# EAGLE board ml-rf-2 (EAGLE 5.00)
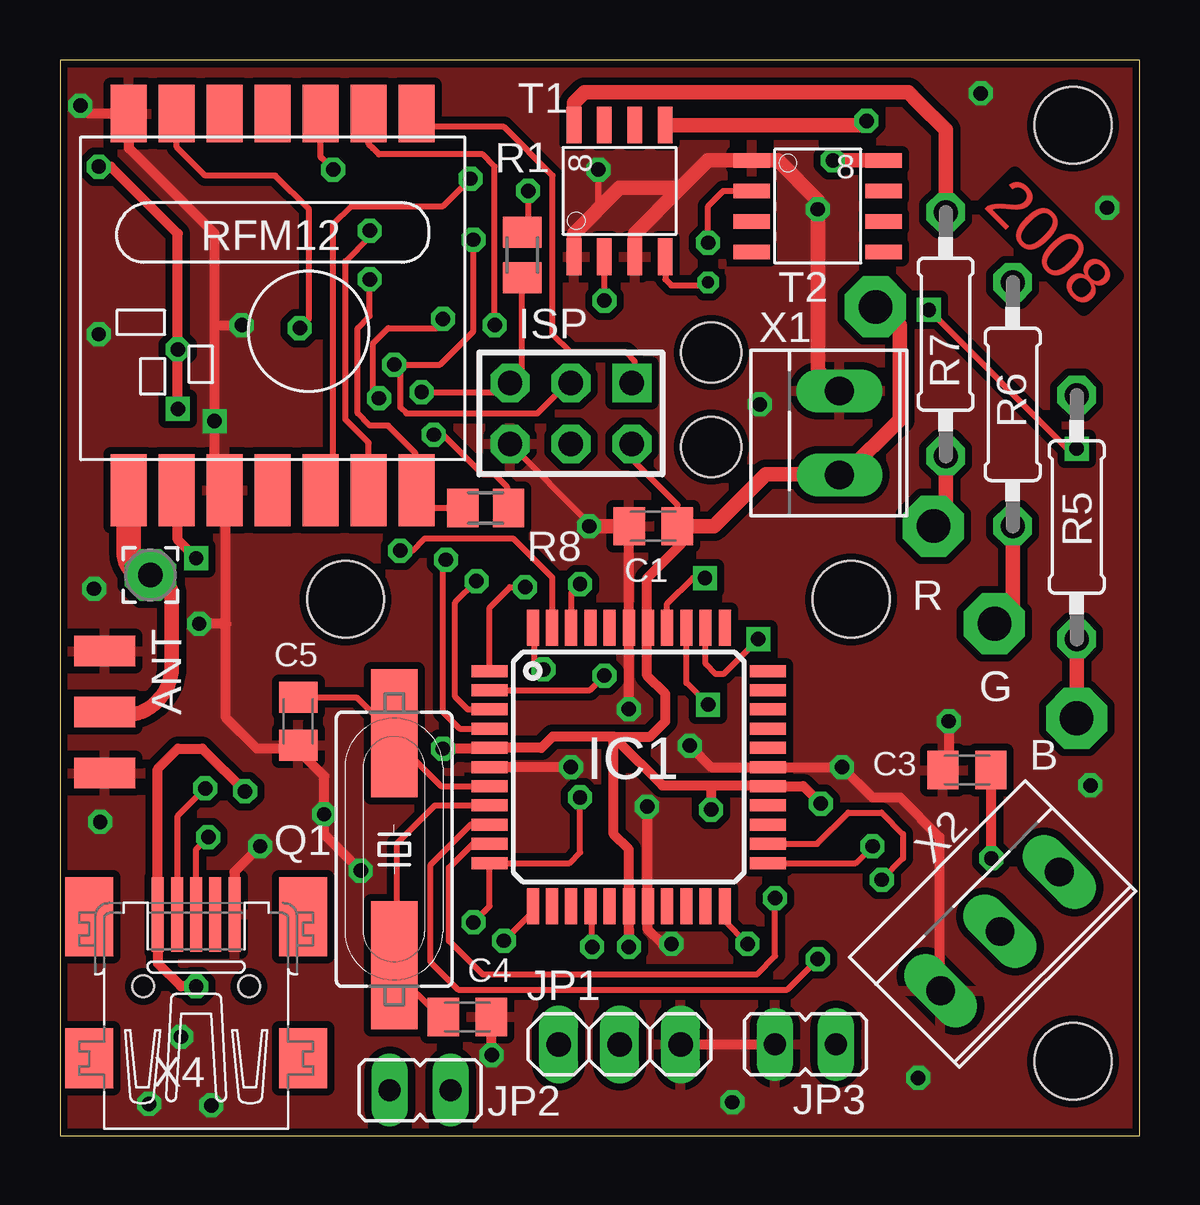
[diagram p0: board, top side]
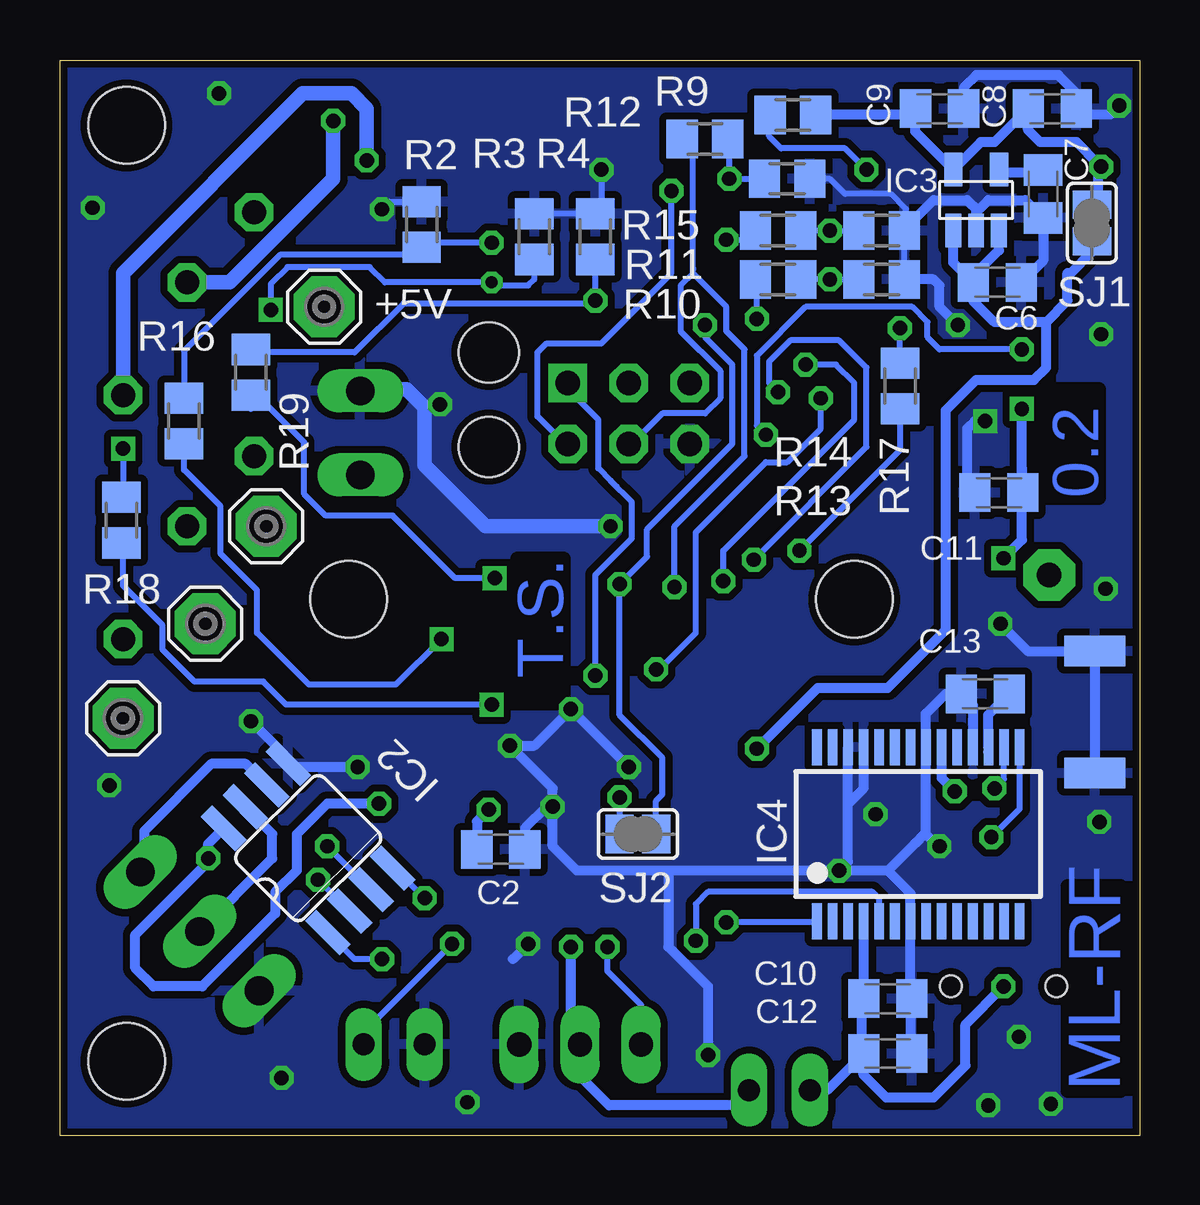
[diagram p1: board, bottom side, seen from below]

Size 45.01 x 44.82 mm. Coordinates in mm from the lower left corner, seen from the top.
Outline: 0,0 45.01,0 45.01,44.82 0,44.82 0,0
Copper layers (1*16): Top 0.035mm / dielectric 1.5mm / Bottom 0.035mm
Design rules "zwlinning *": minimum track width 0.2mm, minimum drill 0.5mm, track to track 0.2mm, track to pad 0.2mm, pad to pad 0.2mm, via to via 0.2mm, smd to smd 0mil, copper to edge 0.3mm, drill to drill 0.3mm, minimum pad ring 0.3mm, minimum via ring 0.2mm, stop-mask expansion 0.1mm, vias tented up to drill 0mil, thermal gap 0.3mm
Holes 3.2 mm at 11.9,22.35 32.98,22.35 42.23,42.1 42.23,3.1
Holes 2.5 mm at 27.14,32.63 27.14,28.7

## Footprints (pad centres in the part's own frame; a part is rotated, then mirrored left to right if it is on the bottom)
SE14 = drill 1.397 pad 2.54 octagon: MP 0,0
2,15/1,0 = drill 1.016 pad 2.159 octagon: 1 0,0
C0805K = smd 1.3 x 1.6: 1 -1,0; 2 1,0
TQFP44 = smd 1.5 x 0.5: 1 -5.8,4; 2 -5.8,3.2; 3 -5.8,2.4; 4 -5.8,1.6; 5 -5.8,0.8; 6 -5.8,0; 7 -5.8,-0.8; 8 -5.8,-1.6; 9 -5.8,-2.4; 10 -5.8,-3.2; 11 -5.8,-4; 23 5.8,-4; 24 5.8,-3.2; 25 5.8,-2.4; 26 5.8,-1.6; 27 5.8,-0.8; 28 5.8,0; 29 5.8,0.8; 30 5.8,1.6; 31 5.8,2.4; 32 5.8,3.2; 33 5.8,4 | smd 0.5 x 1.5: 12 -4,-5.8; 13 -3.2,-5.8; 14 -2.4,-5.8; 15 -1.6,-5.8; 16 -0.8,-5.8; 17 0,-5.8; 18 0.8,-5.8; 19 1.6,-5.8; 20 2.4,-5.8; 21 3.2,-5.8; 22 4,-5.8; 34 4,5.8; 35 3.2,5.8; 36 2.4,5.8; 37 1.6,5.8; 38 0.8,5.8; 39 0,5.8; 40 -0.8,5.8; 41 -1.6,5.8; 42 -2.4,5.8; 43 -3.2,5.8; 44 -4,5.8
SO08 = smd 0.66 x 2.032: 1 -1.905,-3.073; 2 -0.635,-3.073; 3 0.635,-3.073; 4 1.905,-3.073; 5 1.905,3.073; 6 0.635,3.073; 7 -0.635,3.073; 8 -1.905,3.073
SOT-23-5 = smd 0.662 x 1.397: 1 -0.953,-1.27; 2 0,-1.27; 3 0.953,-1.27 | smd 0.762 x 1.397: 4 0.953,1.27; 5 -0.953,1.27
SSOP28 = smd 0.4 x 1.5: 1 -4.225,-3.625; 2 -3.575,-3.625; 3 -2.925,-3.625; 4 -2.275,-3.625; 5 -1.625,-3.625; 6 -0.975,-3.625; 7 -0.325,-3.625; 8 0.325,-3.625; 9 0.975,-3.625; 10 1.625,-3.625; 11 2.275,-3.625; 12 2.925,-3.625; 13 3.575,-3.625; 14 4.225,-3.625; 15 4.225,3.625; 16 3.575,3.625; 17 2.925,3.625; 18 2.275,3.625; 19 1.625,3.625; 20 0.975,3.625; 21 0.325,3.625; 22 -0.325,3.625; 23 -0.975,3.625; 24 -1.625,3.625; 25 -2.275,3.625; 26 -2.925,3.625; 27 -3.575,3.625; 28 -4.225,3.625
AVR-ISP-6 = drill 1.016 square: 1 -2.54,-1.27 | drill 1.016 octagon: 2 -2.54,1.27; 3 0,-1.27; 4 0,1.27; 5 2.54,-1.27; 6 2.54,1.27
1X03 = drill 1.016 long: 1 -2.54,0; 2 0,0; 3 2.54,0
JP1 = drill 0.914 long: 1 0,-1.27; 2 0,1.27
SMD1,27-2,54 = smd 1.27 x 2.54: 1 0,0
HC49UP@1 = smd 5.334 x 1.93: 1 -4.826,0; 2 4.826,0
M0805 = smd 1.3 x 1.6: 1 -0.95,0; 2 0.95,0
0207/10 = drill 1 octagon: 1 -5.08,0; 2 5.08,0
RFM12 = smd 1.5 x 2.4: 1 -5,-9.7; 2 -3,-9.7; 3 -1,-9.7; 4 1,-9.7; 5 3,-9.7; 6 5,-9.7; 7 7,-9.7 | smd 1.5 x 3: 8 7,6; 9 5,6; 10 3,6; 11 1,6; 12 -1,6; 13 -3,6; 14 -5,6
SJ = smd 1.168 x 1.6: 1 -0.762,0; 2 0.762,0
SO-8 = smd 1.524 x 0.61: 1 -2.743,1.27; 2 -2.743,0; 3 -2.743,-1.27; 4 -2.743,-2.54; 5 2.743,-2.54; 6 2.743,-1.27; 7 2.743,0; 8 2.743,1.27
W237-102-3.5-1.2 = drill 1.2 long: 1 -1.7,0 | drill 1.194 long: 2 1.8,0
W237-103-3.5-1.2 = drill 1.2 long: 1 -3.5,0 | drill 1.194 long: 2 0,0; 3 3.5,0
32005-201 = smd 3.1 x 0.5: 1 3,1.6; 2 3,0.8; 3 3,0; 4 3,-0.8; 5 3,-1.6 | smd 2.5 x 2: M1 -3,-4.45; M2 -3,4.45 | smd 3.3 x 2: M3 2.9,4.45; M4 2.9,-4.45 | hole 0.9: 0,2.2; 0,-2.2

## Placement (x,y rotation side)
+5V  SE14  [SE14]  34,34.54 0 bottom
ANT  [2,15/1,0]  3.77,23.36 0 top
B  SE14  [SE14]  42.38,17.39 0 bottom
C1  100nF  [C0805K]  24.73,25.39 180 top
C2  100nF  [C0805K]  26.63,11.93 0 bottom
C3  100nF  [C0805K]  37.81,15.24 180 top
C4  22pF  [C0805K]  16.98,4.95 180 top
C5  22pF  [C0805K]  9.93,17.27 90 top
C6  10µF  [C0805K]  5.93,35.55 0 bottom
C7  10nF  [C0805K]  4.03,39.24 270 bottom
C8  10µF  [C0805K]  3.65,42.79 0 bottom
C9  100nF  [C0805K]  8.34,42.79 0 bottom
C10  100nF  [C0805K]  10.5,5.71 0 bottom
C11  100nF  [C0805K]  5.87,26.79 0 bottom
C12  100nF  [C0805K]  10.5,3.42 0 bottom
C13  100nF  [C0805K]  6.44,18.41 0 bottom
G  SE14  [SE14]  38.95,21.33 0 bottom
IC1  MEGA16-A  [TQFP44]  23.71,15.36 0 top
IC2  MAX481CSA  [SO08]  34.66,11.99 45 bottom
IC3  [SOT-23-5]  6.82,38.98 0 bottom
IC4  FT232RL  [SSOP28]  9.23,12.57 0 bottom
ISP  AVR-ISP-6  [AVR-ISP-6]  21.3,30.09 180 top
JP1  [1X03]  23.33,3.8 0 top
JP2  [JP1]  15.01,1.9 270 top
JP3  [JP1]  31.08,3.8 90 top
PAD1  [SMD1,27-2,54]  1.87,17.65 90 top
PAD2  [SMD1,27-2,54]  1.87,20.19 90 top
PAD3  [SMD1,27-2,54]  1.87,15.11 90 top
PAD4  [SMD1,27-2,54]  1.87,15.11 270 bottom
PAD5  [SMD1,27-2,54]  1.87,20.19 90 bottom
Q1  16Mhz  [HC49UP@1]  13.93,11.93 90 top
R  SE14  [SE14]  36.41,25.39 0 bottom
R1  10K  [M0805]  19.27,36.7 90 top
R2  100K  [M0805]  29.93,37.97 90 bottom
R3  100K  [M0805]  25.23,37.46 90 bottom
R4  100K  [M0805]  22.7,37.46 90 bottom
R5  5R  [0207/10]  42.38,25.78 270 top
R6  5R  [0207/10]  39.71,30.47 270 top
R7  8R  [0207/10]  36.92,33.4 270 top
R8  100K  [M0805]  17.74,26.16 0 top
R9  10K  [M0805]  14.46,42.52 0 bottom
R10  [M0805]  15.07,35.68 0 bottom
R11  [M0805]  15.07,37.71 0 bottom
R12  [M0805]  18.12,41.52 0 bottom
R13  [M0805]  10.76,35.68 0 bottom
R14  [M0805]  10.76,37.71 0 bottom
R15  [M0805]  14.69,39.87 0 bottom
R16  10R  [M0805]  39.84,29.78 270 bottom
R17  10K  [M0805]  9.99,31.24 90 bottom
R18  10R  [M0805]  42.44,25.65 270 bottom
R19  10R  [M0805]  37.05,31.81 270 bottom
RFM12  FRM12  [RFM12]  9.87,32.89 180 top
SJ1  [SJ]  1.99,38.03 90 bottom
SJ2  [SJ]  20.92,12.57 0 bottom
T1  IRF7103  [SO-8]  22.7,39.37 90 top
T2  IRF7103  [SO-8]  31.59,39.37 0 top
X1  [W237-102-3.5-1.2]  32.49,29.33 270 top
X2  [W237-103-3.5-1.2]  39.18,8.51 225 top
X4  MINI-USB-SCHIELD-32005-201  [32005-201]  5.68,6.22 90 top

## Library data of the parts
+5V B G R = solpad
ANT PAD1-PAD5 = wirepad
C1-C13 R1-R4 R8-R19 = rcl
IC1 ISP = atmel
IC2 = maxim
IC3 = regulators
IC4 = ftdichip
JP1 = pinhead
JP2 JP3 SJ1 SJ2 = jumper
Q1 = crystal
R5-R7 = rclml
RFM12 = RFM12
T1 T2 = transistor-fet+irf7201
X1 X2 = clamps
X4 = con-cypressindustries

## Nets
!IRQ: IC1.42 RFM12.2 SJ2.2
!RE: IC1.24 IC2.2
!RST: IC1.4 ISP.5 R1.1
!SS: IC1.44 R10.1
+3V3: C8.1 C9.1 C11.2 IC3.5 R8.2 R9.2 RFM12.9 SJ1.2
+5V: +5V.MP C1.1 C2.1 C3.1 C6.1 IC1.5 IC1.17 IC1.27 IC1.38 IC2.8 IC3.1 IC3.3 ISP.2 JP1.2 JP2.2 R1.2 SJ1.1 X1.2
A: IC2.6 X2.1
B: IC2.7 X2.2
BY: C7.1 IC3.4
DE: IC1.23 IC2.3
GND: C1.2 C2.2 C3.2 C4.1 C5.1 C6.2 C7.2 C8.2 C9.2 C10.2 C11.1 C12.2 C13.1 IC1.6 IC1.18 IC1.28 IC1.39 IC2.5 IC3.2 IC4.7 IC4.18 IC4.21 IC4.25 IC4.26 ISP.6 JP1.3 JP3.2 PAD2.1 PAD3.1 PAD4.1 PAD5.1 R2.2 R3.2 R4.2 R13.2 R14.2 R15.2 RFM12.7 RFM12.10 T1.1 T1.3 T2.1 X1.1 X2.3 X4.5
IR: IC1.15 JP1.1
MISO: IC1.2 ISP.1 RFM12.1
MOSI: IC1.1 ISP.4 R12.1
N$1: R7.1 T1.8
N$3: R11.2 R14.1 RFM12.13
N$4: R6.1 T1.5
N$5: R5.1 T2.8
N$6: R12.2 R15.1 RFM12.12
N$7: R7.2 R.MP
N$8: G.MP R6.2
N$9: B.MP R5.2
N$10: IC4.16 X4.2
N$11: R9.1 RFM12.3
N$12: R17.2 RFM12.6
N$13: ANT.1 PAD1.1 RFM12.8
N$14: R8.1 R10.2 R13.1 RFM12.14
N$16: IC4.15 X4.3
N$17: IC1.22 JP3.1
N$18: IC1.37 R19.2
N$19: IC1.36 R18.2
N$20: C13.2 IC4.17
N$21: IC1.35 R16.2
PB: R2.1 R16.1 T2.2
PG: R3.1 R18.1 T1.4
PR: R4.1 R19.1 T1.2
RF12RST: IC1.43 R17.1
RXD: IC1.9 IC2.1
SCK: IC1.3 ISP.3 R11.1
TXD: IC1.10 IC2.4
USBRX: IC1.12 IC4.5
USBTX: IC1.11 IC4.1 SJ2.1
VBUS: C10.1 C12.1 IC4.4 IC4.20 JP2.1 X4.1
XTAL1: C5.2 IC1.7 Q1.2
XTAL2: C4.2 IC1.8 Q1.1

## Tracks (layer width: path | path; a pad name or v marks a point on that pad's centre or on a via)
!IRQ  (via drill 0.6)
  Top 0.254: 13.04,41.14 13.3,40.89 17.61,40.89 18.12,40.38 v18.12,33.78 | 13.04,41.14 12.92,41.27 | RFM12.2 12.87,41.32 13.04,41.14 | IC1.42 21.31,22.61 v21.68,22.98
  Bottom 0.254: v18.12,33.78 18.12,33.27 16.98,32.13 16.98,28.82 20.54,25.27 20.54,24.12 v21.68,22.98 21.68,17.52 19.9,15.74 19.9,14.22 20.16,13.96 SJ2.2
!RE  (via drill 0.6)
  Top 0.254: IC1.24 31.56,12.16 32.86,13.46 34.25,13.46 35.14,12.57 35.14,11.55 v34.25,10.66
  Bottom 0.254: IC2.2 32.97,9.39 33.11,9.39 33.11,9.52 v34.25,10.66
!RST  (via drill 0.6)
  Top 0.254: 18.5,31.11 ISP.5 18.88,31.36 | v15.07,30.98 18.5,30.98 18.88,31.36 | 19.14,35.81 19.2,35.81 R1.1 | 19.14,35.55 19.27,35.68 R1.1 | IC1.4 16.65,16.96 15.96,17.65 15.96,24 v16.09,24 | R1.1 19.27,35.81 | 18.88,31.36 19.27,31.74 R1.1
  Bottom 0.254: v15.07,30.98 15.46,31.36 15.46,32.25 14.57,33.14 12.54,33.14 11.39,32 11.39,28.7 v16.09,24
!SS  (via drill 0.6)
  Top 0.254: 19.77,21.08 19.71,21.14 IC1.44 19.77,21.1 19.77,21.08 | v15.96,34.03 15.71,33.78 15.71,33.65 13.68,33.65 13.04,33.02 13.04,30.98 v13.3,30.73 | 19.77,21.08 19.77,19.81 v20.16,19.43
  Bottom 0.254: R10.1 15.96,35.68 v15.96,34.03 | v13.3,30.73 13.3,29.46 14.69,28.06 15.58,28.06 18.5,25.14 18.5,20.95 20.03,19.43 v20.16,19.43
+3V3  (via drill 0.6)
  Top 0.254: v15.58,29.2 15.96,29.2 17.61,27.55 18.12,27.55 18.63,27.05 18.63,26.16 R8.2
  Top 0.305: RFM12.9 4.92,26.93
  Top 0.406: v1.61,40.38 2.12,40.38 4.92,37.59 v4.92,32.76 v4.92,30.28 | RFM12.9 4.9,26.86 4.92,26.86 4.92,24.82 v5.68,24.06
  Bottom 0.254: v15.58,29.2 15.96,29.59 15.96,32.51 13.93,34.54 9.49,34.54 8.85,33.9 8.85,33.27 8.34,32.76 v4.92,32.76
  Bottom 0.406: 13.52,42.54 13.68,42.54 | 13.52,42.54 R9.2 | 13.52,42.54 9.6,42.54 C9.1 9.36,42.79 9.36,41.84 IC3.5 6.63,41.4 6.06,41.4 4.79,42.67 4.53,42.67 4.53,42.68 C8.1 4.64,42.56 4.66,42.54 4.66,41.91 4.15,41.4 2.63,41.4 1.74,40.51 1.74,40.25 | v1.61,40.38 1.74,40.25 | 4.92,27.81 4.92,24.82 v5.68,24.06 | 4.92,27.81 v4.92,30.28 | C11.2 4.92,26.84 4.92,27.81 | SJ1.2 1.99,38.86 1.74,39.11 1.74,40.25
+5V  (via drill 0.6)
  Top 0.254: ISP.2 23.84,28.19 25.74,26.28 C1.1 | R1.2 19.27,37.71 19.52,37.97 v19.52,39.37
  Top 0.406: 23.08,16.63 20.54,16.63 20.07,16.16 IC1.5 17.87,16.12 v15.96,16.12 | 23.08,16.63 24.6,16.63 25.23,17.27 25.23,18.41 24.47,19.17 24.47,21.2 | 23.08,16.5 23.08,12.57 23.71,11.93 IC1.17 23.71,8.63 | 23.08,16.5 23.08,16.63 | 23.08,16.5 23.2,16.5 25.11,14.6 27.14,14.6 | 24.47,21.2 IC1.38 | 24.47,21.2 24.47,23.24 25.87,24.63 25.87,25.27 C1.1 | 27.14,14.6 29.47,14.6 IC1.27 30.99,14.56 v31.71,13.84 | 27.14,14.6 v27.14,13.58 | C3.1 38.82,15.22 v38.82,11.55 | 23.71,8.63 23.71,8.38 | v23.71,7.87 23.71,8.63
  Top 0.61: C1.1 27.27,25.39 29.43,27.55 32.47,27.55 X1.2 32.71,27.53 35.01,29.84 35.01,33.78 34.25,34.54 +5V.MP
  Bottom 0.254: ISP.2 23.96,28.82 25.11,29.97 25.11,32.63 24.73,33.02 22.44,33.02 19.52,35.94 v19.52,39.37
  Bottom 0.406: C2.1 27.63,13.09 v27.14,13.58 | IC3.1 7.77,36.38 7.07,35.68 | 6.95,35.55 7.07,35.68 | IC3.3 5.87,36.89 7.07,35.68 | 3.9,33.9 3.01,34.79 3.01,35.94 2.88,35.94 1.99,36.83 SJ1.1 | 3.9,33.9 6.06,33.9 6.95,34.79 6.95,35.55 | 6.95,35.55 C6.1 | IC2.8 38.82,12.17 38.82,11.68 | v31.71,13.84 33.87,13.84 35.14,12.57 35.14,11.04 36.03,10.16 36.03,9.27 39.08,6.22 41.11,6.22 41.87,6.98 41.87,8.38 38.82,11.43 38.82,11.68 | 38.82,11.68 v38.82,11.55 | v15.96,16.12 13.42,18.66 10.5,18.66 8.09,21.08 8.09,30.22 6.82,31.49 4.41,31.49 3.9,32 3.9,33.9 | v23.71,7.87 23.71,4.25 23.27,3.8 JP1.2 23.27,3.74 23.33,3.68 23.33,2.47 22.12,1.27 16.92,1.27 JP2.2
A
  Bottom 0.406: IC2.6 37.27,15.49 38.7,15.49 41.49,12.7 41.49,10.92 41.59,10.92 X2.1
B
  Bottom 0.406: IC2.7 36.16,12.58 36.16,11.55 39.21,8.5 39.21,8.49 | 39.21,8.49 39.21,8.38 | X2.2 39.21,8.49
BY
  Bottom 0.406: C7.1 4.03,40.13 5.74,40.13 IC3.4
DE  (via drill 0.6)
  Top 0.254: IC1.23 33.17,11.36 v33.87,12.06
  Bottom 0.254: IC2.3 32.07,10.26 v33.87,12.06
GND  (via drill 0.6)
  Top 0.254: 23.96,36.7 T1.3 24.09,36.5 | 24.47,9.65 24.47,9.6 IC1.18 24.47,9.52 | 21.43,36.7 21.3,36.83 | 31.6,38.48 31.59,38.48 v31.59,38.6 | 21.43,37.59 22.44,38.6 v22.44,40.25 | ISP.6 22.06,25.52 v22.06,25.39
  Top 0.406: v21.3,15.36 IC1.6 | 24.47,9.56 24.47,9.52 24.47,9.39 | 24.47,9.56 IC1.18 24.51,9.61 24.47,9.65 | v24.47,13.71 24.47,9.65 | 24.47,9.65 24.47,9.56 | 29.55,15.36 IC1.28 29.43,15.36 | v23.71,17.77 IC1.39 23.71,25.39 | 29.43,15.36 27.14,15.36 v26.25,16.25 | 6.82,27.05 6.95,26.92 6.92,26.89 | 6.92,26.89 RFM12.10 6.87,27 6.82,27.05 | 6.82,27.05 6.44,27.43 v6.44,29.78 6.44,33.78 | v0.85,42.92 1.18,42.59 RFM12.7 2.8,42.59 2.76,42.54 2.76,42.79 2.88,42.67 2.88,41.14 6.44,37.59 6.44,33.78 | 6.44,33.78 v7.58,33.78 | 29.43,15.36 v32.6,15.36 33.87,14.09 35.01,14.09 36.67,12.44 36.67,6 | 36.67,6 36.67,5.84 | 36.67,6 X2.3 | C3.2 37.05,15.47 v37.05,17.27 | v25.49,8 25.11,8 24.47,8.63 24.47,9.65 | 26.12,3.8 JP3.2 | 6.92,21.33 6.92,26.89 | v12.54,11.04 11.01,12.57 11.01,14.98 9.87,16.12 | 6.92,21.33 6.95,21.33 | 6.92,21.33 v5.8,21.33 | X4.5 7.28,10.99 v8.34,12.06 | C4.1 17.98,3.38 v18,3.36 | 6.92,21.33 6.92,17.42 8.22,16.12 9.87,16.12 | C5.1 9.93,16.25 9.99,16.19 9.93,16.12 9.87,16.12
  Top 0.61: 31.6,38.48 31.6,38.97 29.93,40.64 29.17,40.64 | 28.79,40.64 T2.1 29.17,40.64 | 29.17,40.64 27.01,40.64 25.87,39.49 | 25.87,39.49 23.96,37.59 23.96,36.7 | T1.1 21.43,36.7 21.43,37.59 23.33,39.49 25.87,39.49 | X1.1 32.49,31 32.47,30.98 31.59,31.87 31.59,38.48 | C1.2 23.71,25.39 v22.06,25.39
  Bottom 0.254: R3.2 22.88,38.41 22.82,38.35 22.76,38.41 R4.2 22.63,38.35 22.44,38.35 v22.44,40.25 | R2.2 31.27,38.92 v31.59,38.6 | R15.2 12.92,39.87 12.28,39.24 10.38,39.24 9.74,38.6 9.74,37.84 9.87,37.71 | 9.87,37.71 9.99,37.59 | 9.87,37.71 R14.2 9.81,35.74 9.87,35.68 R13.2 | 11.52,16.25 11.51,16.24 IC4.25
  Bottom 0.406: v24.47,13.71 24.47,14.47 v26.25,16.25 25.23,16.25 v23.71,17.77 v21.3,15.36 | v24.47,13.71 24.73,13.71 25.62,12.82 25.62,11.93 C2.2 | 6.76,38.54 6.31,38.98 4.77,38.98 C7.2 4.03,36.46 C6.2 | 6.76,38.54 6.82,38.48 6.82,37.84 6.69,37.71 IC3.2 | C9.2 7.34,42.81 7.46,42.92 7.33,43.05 7.33,43.68 6.82,44.19 3.39,44.19 2.65,43.45 C8.2 2.63,42.78 2.63,42.54 1.23,42.54 v0.85,42.92 | 9.74,37.84 8.6,38.98 7.2,38.98 6.76,38.54 | R13.2 8.6,35.68 8.34,35.43 8.34,34.54 v7.58,33.78 | v24.47,13.71 24.47,12.06 23.46,11.04 19.71,11.04 | 14.44,11.04 14.31,11.04 | 14.44,11.04 19.71,11.04 | v32.6,15.36 35.35,15.36 IC2.5 35.6,15.62 35.65,15.62 35.65,15.87 v37.05,17.27 | v25.49,8 26.12,7.36 | 6.95,16.18 6.95,15.87 | 6.95,16.18 IC4.18 | 6.95,16.18 6.95,17.92 C13.1 8.09,18.41 8.92,17.58 8.92,16.06 | v12.54,11.04 14.44,11.04 | 1.87,14.98 PAD4.1 PAD5.1 4.66,20.19 v5.8,21.33 | 10.5,11.04 9.56,10.1 IC4.7 9.56,5.78 9.49,5.71 C10.2 9.55,5.66 9.55,3.42 C12.2 | 10.5,11.04 v12.54,11.04 | 10.5,11.04 9.36,12.19 | 9.36,12.19 8.97,12.58 | v12.54,11.04 12.66,10.92 | 12.16,13.84 12.16,11.42 v12.54,11.04 | 12.16,13.84 IC4.26 | 12.16,13.84 12.15,13.84 11.51,14.48 11.51,16.24 | 8.92,16.06 8.92,12.63 8.95,12.6 | 9.36,12.19 8.95,12.6 | 8.95,12.6 | v8.34,12.06 8.41,12.06 8.95,12.6 | v18,3.36 18,6.22 19.65,7.87 19.65,10.98 19.71,11.04 | 8.92,16.06 IC4.21 | C11.1 7.2,27.13 7.2,29.46 6.88,29.78 v6.44,29.78
  Bottom 0.61: v22.06,25.39 27.27,25.39 29.81,27.93 29.81,30.35 30.57,31.11 32.47,31.11 32.49,31.09 X1.1
  other vias: 5.04,4.12 35.78,2.41 42.95,14.6 29.17,30.47 1.61,33.4 1.42,22.79 1.68,13.08 38.38,43.43 43.65,38.67 11.01,13.39 28.03,1.39 3.71,1.33 6.31,1.27
  pour Bottom (isolate 0.305): -0.42,45.21 45.81,45.52 45.94,-1.02 -0.42,-0.39
  pour Top (isolate 0.305): -0.42,45.21 45.87,45.4 45.94,-0.89 -0.17,-0.39
IR  (via drill 0.6)
  Top 0.254: IC1.15 22.11,9.57 22.19,9.65 v22.19,7.87
  Bottom 0.254: v22.19,7.87 22.19,6.85 20.79,5.46 20.79,3.68 | JP1.1 20.79,3.68 | 20.79,3.68 20.85,3.61
MISO  (via drill 0.6)
  Top 0.254: ISP.1 23.84,31.24 23.96,31.36 23.96,32.25 23.58,32.63 21.3,32.63 20.54,33.4 20.54,40 18.5,42.03 14.82,42.03 14.82,42.54 RFM12.1 | IC1.2 22.09,18.56 v22.7,19.17
  Top 0.406: 17.87,18.54 17.89,18.54 IC1.2
  Top 0.61: RFM12.1 14.82,42.54 14.82,43.05
  Bottom 0.254: ISP.1 23.84,31.11 22.57,29.84 22.57,27.81 22.06,27.3 | 22.06,27.3 21.81,27.05 | 22.06,27.3 21.17,26.41 21.17,24.89 22.7,23.36 v22.7,19.17
MOSI  (via drill 0.6)
  Top 0.254: 17.87,19.3 17.87,19.32 IC1.1 17.91,22.01 18.76,22.85 v19.39,22.85
  Bottom 0.254: ISP.4 21.17,28.82 19.9,30.09 18.12,30.09 17.49,30.73 17.49,31.87 19.14,33.52 19.14,35.43 18.63,35.94 | R12.1 19.01,41.52 18.63,41.14 18.63,36.19 | 18.63,36.19 18.63,36.06 | 18.63,35.94 17.23,34.54 17.23,33.52 16.47,32.76 16.47,28.32 19.39,25.39 v19.39,22.85 | 18.63,35.94 18.63,36.19
N$1
  Top 0.61: R7.1 36.92,41.91 35.76,43.07 35.36,43.47 21.86,43.47 21.43,43.03 T1.8
N$3  (via drill 0.6)
  Top 0.254: RFM12.13 12.87,28.87 11.9,29.84 11.9,36.44 12.92,37.46 v12.92,37.71
  Bottom 0.254: R14.1 v12.92,37.71 R11.2
N$4  (via drill 0.6)
  Top 0.61: T1.5 33.44,42.11 v33.62,42.29
  Bottom 0.61: R6.1 37.94,35.55 33.62,39.87 v33.62,42.29
N$5  (via drill 0.6)
  Top 0.61: v32.22,40.64 T2.8
  Bottom 0.61: v32.22,40.64 32.22,42.79 32.86,43.43 34.89,43.43 42.38,35.94 R5.1
N$6  (via drill 0.6)
  Top 0.254: v17.11,39.87 15.96,38.73 12.15,38.73 11.39,37.97 11.39,27.43 10.87,26.9 RFM12.12
  Bottom 0.254: R12.2 17.11,41.52 v17.11,39.87 R15.1
N$7
  Top 0.61: R.MP 36.54,25.39 36.92,25.78 R7.2
N$8
  Top 0.61: R6.2 39.71,22.09 G.MP
N$9
  Top 0.61: B.MP R5.2
N$10  (via drill 0.6)
  Top 0.254: v6.06,14.47 4.92,13.33 4.92,9.52 4.88,9.48 X4.2
  Bottom 0.254: IC4.16 5.66,14.87 v6.06,14.47
N$11  (via drill 0.6)
  Top 0.254: v11.39,40.25 11.01,40.64 | 11.01,40.64 10.88,40.76 | RFM12.3 10.87,40.78 11.01,40.64
  Bottom 0.254: v11.39,40.25 12.28,41.14 14.95,41.14 15.46,41.65 15.46,42.54 15.44,42.52 R9.1
N$12  (via drill 0.6)
  Top 0.254: RFM12.6 4.87,41.19 6.06,40 8.98,40 10.38,38.6 10.38,34.03 v9.99,33.65
  Bottom 0.254: 9.99,32.13 R17.2 v9.99,33.65
N$13
  Top 0.61: PAD1.1 arc111 4.66,19.55 4.66,22.47 arc90 ANT.1
  Top 1.016: RFM12.8 2.87,24.27 arc90 ANT.1
N$14  (via drill 0.6)
  Top 0.254: 14.95,26.16 14.95,26.92 14.9,26.92 RFM12.14 14.87,27.68 | 14.95,26.16 14.95,26.1 | 14.87,27.68 14.87,27.76 | v12.92,35.68 12.92,34.16 12.41,33.65 12.41,30.09 12.92,29.59 13.68,29.59 14.82,28.44 14.82,27.68 14.87,27.68 | 14.95,26.16 14.82,26.16 | 14.95,26.16 R8.1
  Bottom 0.254: R13.1 v12.92,35.68 R10.2 14.19,35.68
N$16  (via drill 0.6)
  Top 0.254: 5.68,9.14 X4.3 5.68,11.93 v6.18,12.44
  Bottom 0.254: IC4.15 5.01,13.62 v6.18,12.44
N$17  (via drill 0.6)
  Top 0.254: IC1.22 27.67,9.52 27.65,9.52 27.65,9.01 v28.66,8
  Bottom 0.254: JP3.1 32.35,4.31 v28.66,8
N$18  (via drill 0.6)
  Top 0.254: IC1.37 25.31,22.17 26.38,23.24 v26.89,23.24
  Bottom 0.254: R19.2 37.05,30.98 | R19.2 37.05,30.28 | R19.2 36.8,30.86 34.82,28.89 34.82,26.73 33.93,25.84 31.14,25.84 28.54,23.24 v26.89,23.24
N$19  (via drill 0.6)
  Top 0.254: IC1.36 26.11,18.87 v27.01,17.97
  Bottom 0.254: v27.01,17.97 35.59,17.97 36.54,18.92 39.4,18.92 40.73,20.25 40.73,21.27 42.38,22.92 42.38,24.7 R18.2
N$20
  Bottom 0.406: IC4.17 6.31,16 | IC4.17 | C13.2 6.31,17.54 IC4.17
N$21  (via drill 0.6)
  Top 0.254: IC1.35 26.91,19.65 27.33,19.23 27.65,19.23 v29.11,20.7
  Bottom 0.254: v29.11,20.7 31.01,18.79 34.63,18.79 36.79,20.95 36.79,22.73 38.32,24.25 38.32,26.22 39.84,27.74 R16.2 39.84,29.14
PB  (via drill 0.6)
  Top 0.254: T2.2 28.79,39.37 | v27.01,37.21 27.01,38.73 27.65,39.37 T2.2 | T2.2 28.92,39.37
  Bottom 0.254: R2.1 29.93,36.95 | R2.1 29.75,37.21 v27.01,37.21 | R2.1 29.93,36.7 35.84,36.7 39.84,32.7 R16.1
PG  (via drill 0.5, 0.6)
  Top 0.254: T1.4 25.23,35.68 25.49,35.43 26.89,35.43 v27.01,35.55 | v36.22,34.41 42,28.63 v42.38,28.63
  Bottom 0.254: v27.01,35.55 26.89,35.55 | v27.01,35.55 31.46,35.55 32.09,36.19 35.52,36.19 36.22,35.49 v36.22,34.41 | R3.1 25.23,35.68 25.49,35.43 26.89,35.43 v27.01,35.55 | 42.38,26.54 42.38,26.22 | 42.38,26.54 R18.1 | v42.38,28.63 42.38,26.54
PR  (via drill 0.6)
  Top 0.254: v22.7,34.79 T1.2
  Bottom 0.254: 22.7,36.57 R4.1 v22.7,34.79 22.7,34.67 30.7,34.67 32.73,32.63 36.98,32.63 37.05,32.7 R19.1
RF12RST  (via drill 0.6)
  Top 0.254: v14.19,24.38 14.69,24.38 15.2,24.89 18.88,24.89 20.51,23.26 20.51,21.55 20.54,21.52 20.51,21.5 IC1.43
  Bottom 0.254: 9.99,30.35 R17.1 9.99,28.57 v14.19,24.38
RXD  (via drill 0.6)
  Top 0.254: IC1.9 17.12,12.96 15.46,11.3 15.46,7.23 16.6,6.09 30.32,6.09 v31.59,7.36
  Bottom 0.254: IC2.1 33.87,8.5 | IC2.1 | v31.59,7.36 32.73,7.36 IC2.1
SCK  (via drill 0.6)
  Top 0.254: 18.02,17.65 IC1.3 16.99,17.76 16.47,18.28 16.47,22.22 v17.36,23.11 | ISP.3 21.17,31.36 19.9,30.09 14.44,30.09 14.19,30.35 14.19,32.13 v13.93,32.13 15.84,32.13 17.23,33.52 v17.23,37.33
  Bottom 0.254: R11.1 16.09,37.71 16.47,37.33 v17.23,37.33 | v13.93,32.13 12.66,32.13 11.9,31.36 11.9,29.84 17.36,24.38 v17.36,23.11
TXD  (via drill 0.6)
  Top 0.254: IC1.10 17.21,12.16 16.22,11.17 16.22,8.12 17.61,6.73 29.04,6.73 29.81,7.49 29.81,9.77 | 29.81,9.77 29.81,9.52 | 29.81,9.77 v29.81,9.9
  Bottom 0.254: 31.14,11.24 31.46,11.55 | 31.14,11.24 IC2.4 | v29.81,9.9 31.14,11.24
USBRX  (via drill 0.6)
  Top 0.254: 19.65,9.63 19.65,9.77 | 19.65,9.63 IC1.12 | v18.5,8.12 19.65,9.27 19.65,9.63
  Bottom 0.254: IC4.5 10.86,9.88 11.14,10.16 18,10.16 18.5,9.65 v18.5,8.12 18.57,8.06
USBTX  (via drill 0.6)
  Top 0.254: v21.68,14.09 21.68,11.81 21.23,11.36 IC1.11 17.91,9.56 v17.23,8.88
  Bottom 0.254: v21.68,14.09 SJ2.1 | IC4.1 13.49,8.94 13.55,8.88 v17.23,8.88
VBUS  (via drill 0.6)
  Top 0.406: v7.71,14.35 5.93,16.12 4.92,16.12 4.08,15.29 X4.1 4.08,8.96 4.09,8.95 4.09,7.17 5.04,6.22 v5.68,6.22
  Bottom 0.406: v7.71,14.35 8.15,14.79 | 8.15,14.79 8.22,14.85 | IC4.20 8.26,14.89 8.15,14.79 | 11.51,5.66 11.5,5.66 C10.1 | 11.51,5.66 IC4.4 | C12.1 11.57,3.36 11.58,3.36 11.58,5.58 11.51,5.66 | 13.8,1.9 JP2.1 13.03,1.9 C12.1 | v5.68,6.22 7.26,4.63 7.26,2.92 8.6,1.58 10.57,1.58 11.52,2.53 11.52,3.41 C12.1
XTAL1
  Top 0.254: IC1.7 15.88,14.56 13.68,16.76 Q1.2 13.93,16.7 12.36,18.27 C5.2
XTAL2
  Top 0.254: IC1.8 15.63,13.76 14.06,12.19 14.06,7.11 13.93,6.98 Q1.1 13.93,6.85 15.84,4.95 C4.2

## Text on the board
Top: 2008
Bottom: 0.2 | T.S. | ML-RF